# EAGLE board 10x10_charlieplexed_3.2x3.2_dual_headers (EAGLE 6.0)
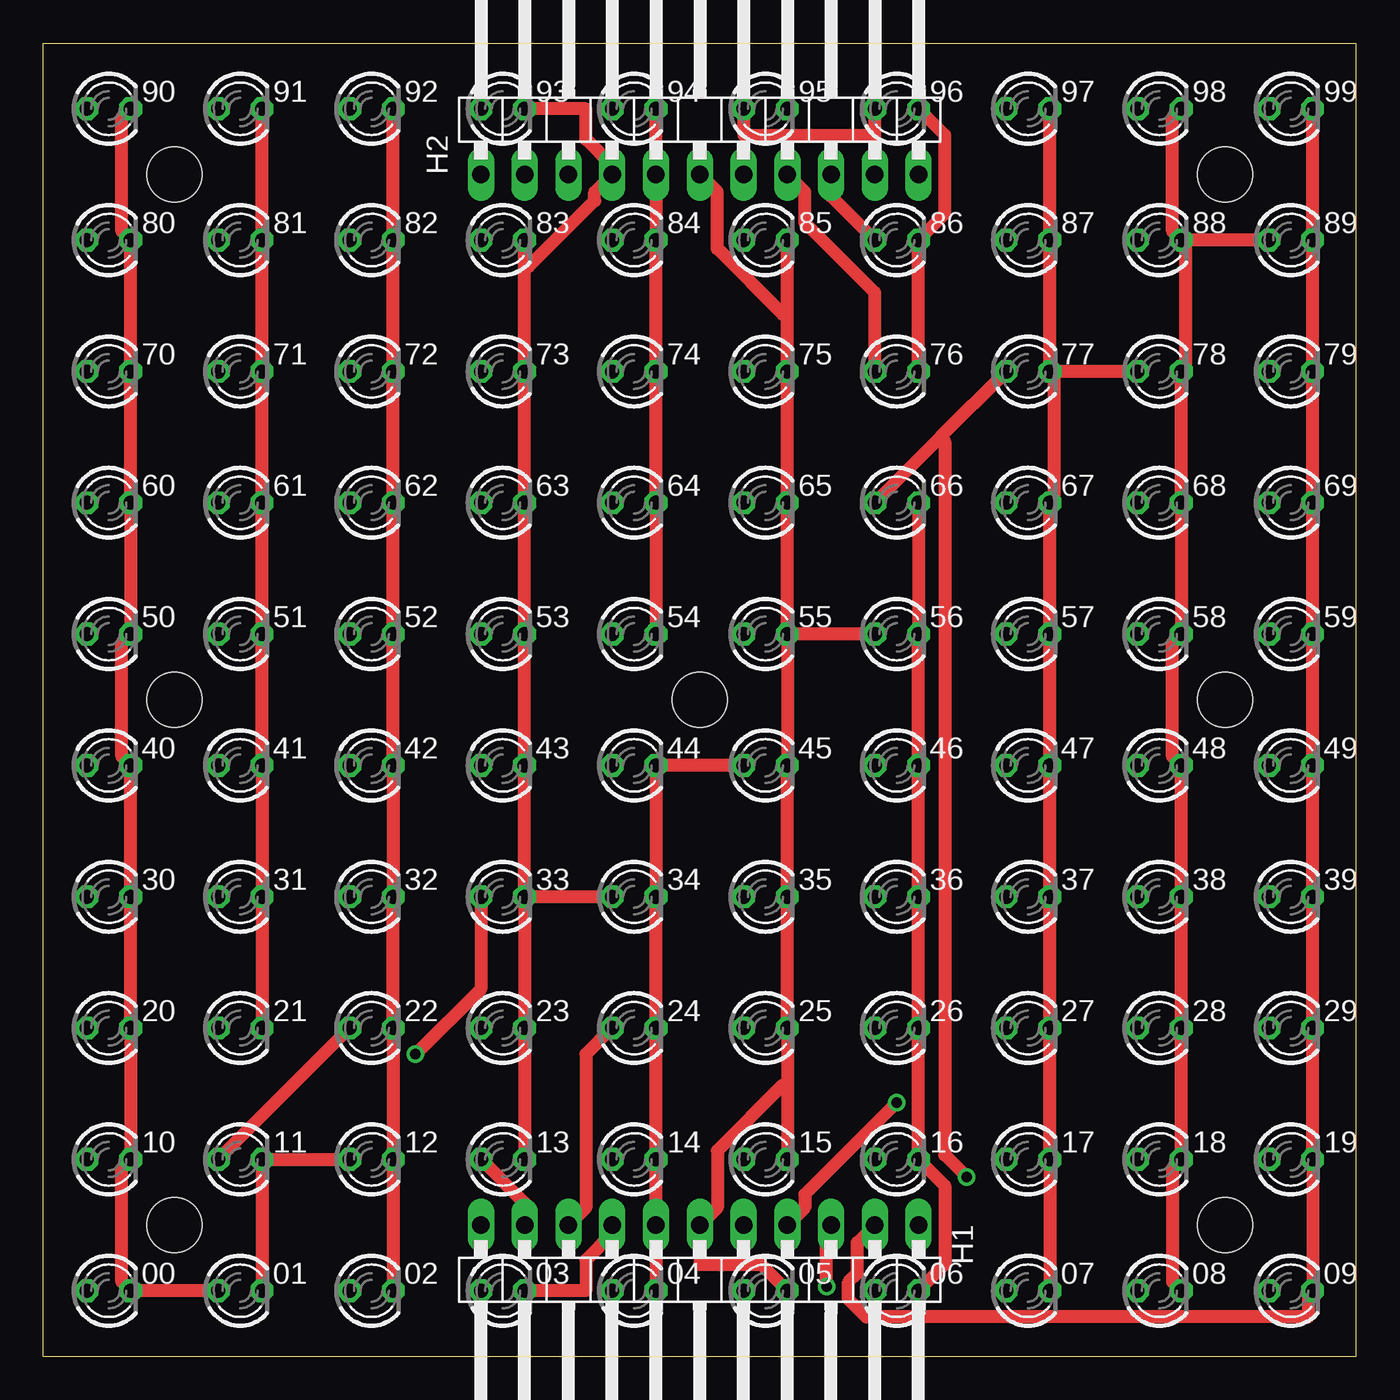
[diagram p0: board, top side]
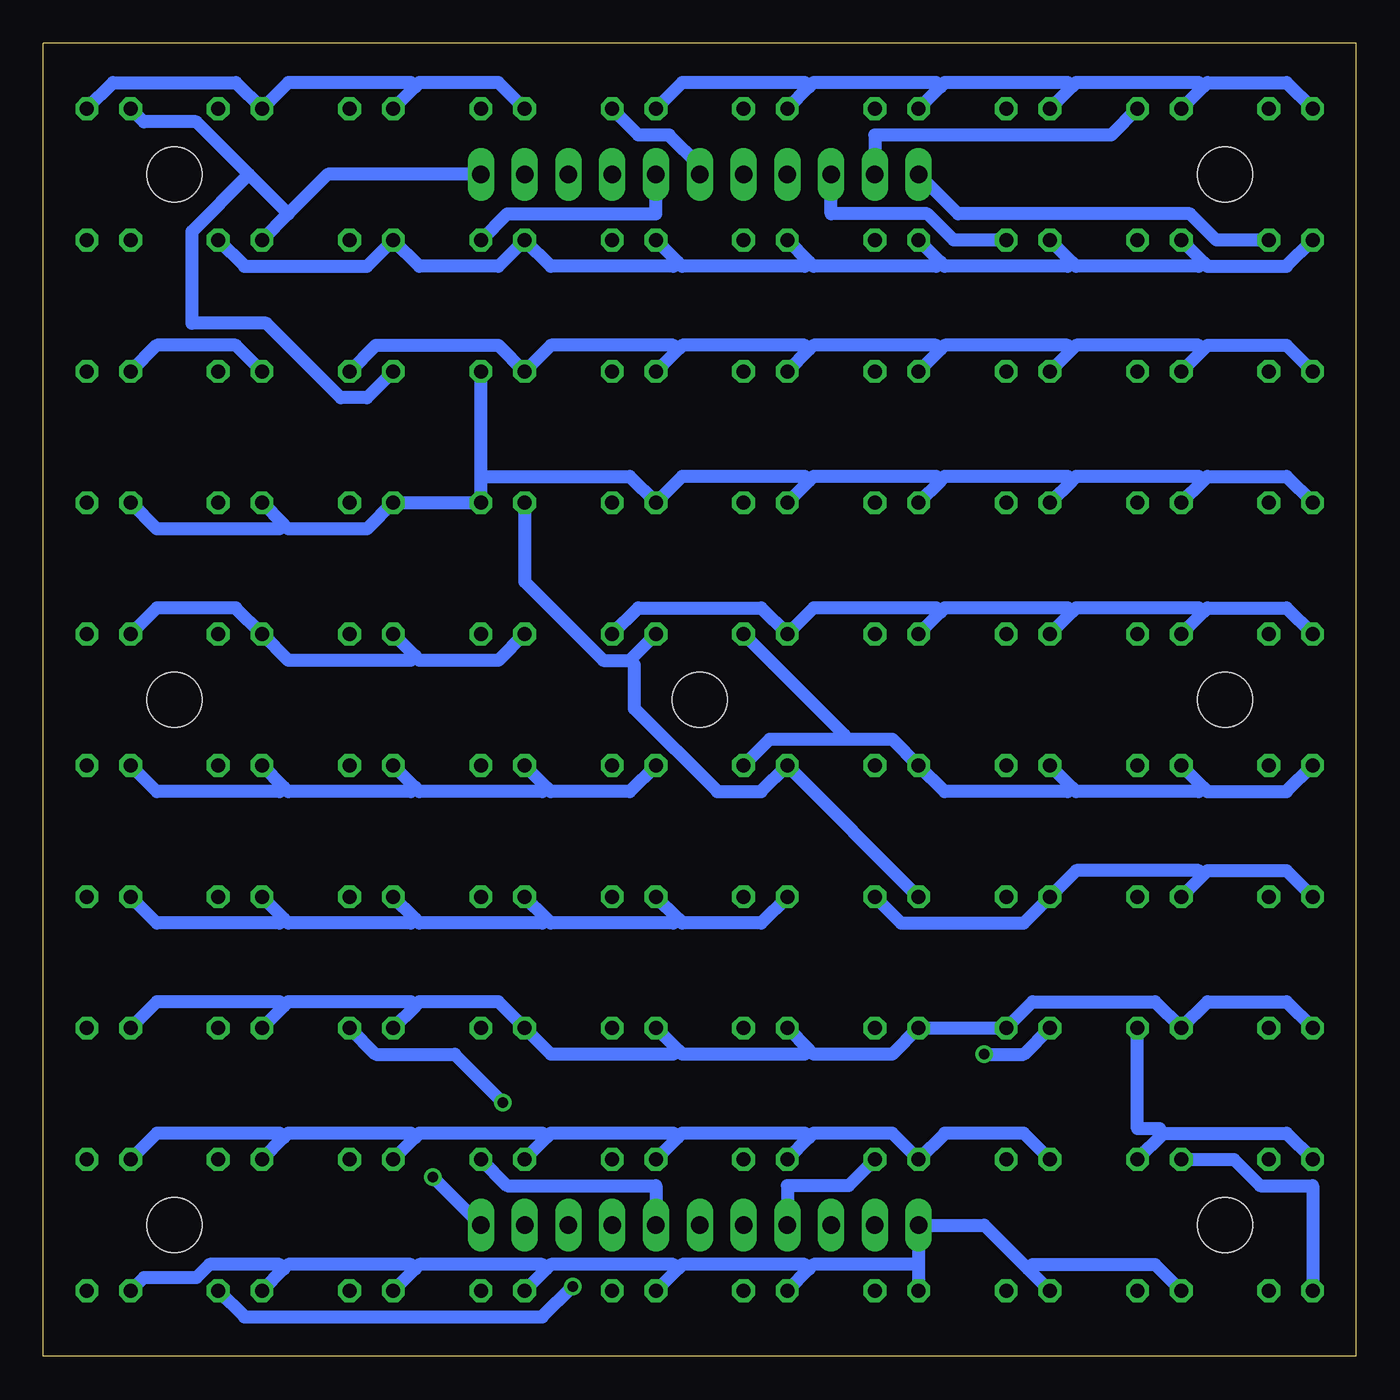
[diagram p1: board, bottom side, seen from below]

Size 76.2 x 76.2 mm. Coordinates in mm from the lower left corner, seen from the top.
Outline: 0,0 0,76.2 76.2,76.2 76.2,0 0,0
Copper layers (1*16): Top 0.035mm / dielectric 1.5mm / Bottom 0.035mm
Design rules: minimum track width 30mil, minimum drill 24mil, track to track 15mil, track to pad 15mil, pad to pad 8mil, via to via 8mil, smd to smd 8mil, copper to edge 40mil, drill to drill 8mil, minimum pad ring 10mil, minimum via ring 8mil, stop-mask expansion 4mil, vias tented up to drill 0mil, thermal gap 10mil
Holes 3.2 mm at 7.62,68.58 68.58,68.58 68.58,7.62 7.62,7.62 7.62,38.1 68.58,38.1 38.1,38.1

## Footprints (pad centres in the part's own frame; a part is rotated, then mirrored left to right if it is on the bottom)
LED3MM = drill 0.813 octagon: A -1.27,0; K 1.27,0
1X11/90 = drill 1.016 long: 1 -12.7,-3.81; 2 -10.16,-3.81; 3 -7.62,-3.81; 4 -5.08,-3.81; 5 -2.54,-3.81; 6 0,-3.81; 7 2.54,-3.81; 8 5.08,-3.81; 9 7.62,-3.81; 10 10.16,-3.81; 11 12.7,-3.81

## Placement (x,y rotation side)
00  [LED3MM]  3.81,3.81 0 top
01  [LED3MM]  11.43,3.81 0 top
02  [LED3MM]  19.05,3.81 0 top
03  [LED3MM]  26.67,3.81 0 top
04  [LED3MM]  34.29,3.81 0 top
05  [LED3MM]  41.91,3.81 0 top
06  [LED3MM]  49.53,3.81 0 top
07  [LED3MM]  57.15,3.81 0 top
08  [LED3MM]  64.77,3.81 0 top
09  [LED3MM]  72.39,3.81 0 top
10  [LED3MM]  3.81,11.43 0 top
11  [LED3MM]  11.43,11.43 0 top
12  [LED3MM]  19.05,11.43 0 top
13  [LED3MM]  26.67,11.43 0 top
14  [LED3MM]  34.29,11.43 0 top
15  [LED3MM]  41.91,11.43 0 top
16  [LED3MM]  49.53,11.43 0 top
17  [LED3MM]  57.15,11.43 0 top
18  [LED3MM]  64.77,11.43 0 top
19  [LED3MM]  72.39,11.43 0 top
20  [LED3MM]  3.81,19.05 0 top
21  [LED3MM]  11.43,19.05 0 top
22  [LED3MM]  19.05,19.05 0 top
23  [LED3MM]  26.67,19.05 0 top
24  [LED3MM]  34.29,19.05 0 top
25  [LED3MM]  41.91,19.05 0 top
26  [LED3MM]  49.53,19.05 0 top
27  [LED3MM]  57.15,19.05 0 top
28  [LED3MM]  64.77,19.05 0 top
29  [LED3MM]  72.39,19.05 0 top
30  [LED3MM]  3.81,26.67 0 top
31  [LED3MM]  11.43,26.67 0 top
32  [LED3MM]  19.05,26.67 0 top
33  [LED3MM]  26.67,26.67 0 top
34  [LED3MM]  34.29,26.67 0 top
35  [LED3MM]  41.91,26.67 0 top
36  [LED3MM]  49.53,26.67 0 top
37  [LED3MM]  57.15,26.67 0 top
38  [LED3MM]  64.77,26.67 0 top
39  [LED3MM]  72.39,26.67 0 top
40  [LED3MM]  3.81,34.29 0 top
41  [LED3MM]  11.43,34.29 0 top
42  [LED3MM]  19.05,34.29 0 top
43  [LED3MM]  26.67,34.29 0 top
44  [LED3MM]  34.29,34.29 0 top
45  [LED3MM]  41.91,34.29 0 top
46  [LED3MM]  49.53,34.29 0 top
47  [LED3MM]  57.15,34.29 0 top
48  [LED3MM]  64.77,34.29 0 top
49  [LED3MM]  72.39,34.29 0 top
50  [LED3MM]  3.81,41.91 0 top
51  [LED3MM]  11.43,41.91 0 top
52  [LED3MM]  19.05,41.91 0 top
53  [LED3MM]  26.67,41.91 0 top
54  [LED3MM]  34.29,41.91 0 top
55  [LED3MM]  41.91,41.91 0 top
56  [LED3MM]  49.53,41.91 0 top
57  [LED3MM]  57.15,41.91 0 top
58  [LED3MM]  64.77,41.91 0 top
59  [LED3MM]  72.39,41.91 0 top
60  [LED3MM]  3.81,49.53 0 top
61  [LED3MM]  11.43,49.53 0 top
62  [LED3MM]  19.05,49.53 0 top
63  [LED3MM]  26.67,49.53 0 top
64  [LED3MM]  34.29,49.53 0 top
65  [LED3MM]  41.91,49.53 0 top
66  [LED3MM]  49.53,49.53 0 top
67  [LED3MM]  57.15,49.53 0 top
68  [LED3MM]  64.77,49.53 0 top
69  [LED3MM]  72.39,49.53 0 top
70  [LED3MM]  3.81,57.15 0 top
71  [LED3MM]  11.43,57.15 0 top
72  [LED3MM]  19.05,57.15 0 top
73  [LED3MM]  26.67,57.15 0 top
74  [LED3MM]  34.29,57.15 0 top
75  [LED3MM]  41.91,57.15 0 top
76  [LED3MM]  49.53,57.15 0 top
77  [LED3MM]  57.15,57.15 0 top
78  [LED3MM]  64.77,57.15 0 top
79  [LED3MM]  72.39,57.15 0 top
80  [LED3MM]  3.81,64.77 0 top
81  [LED3MM]  11.43,64.77 0 top
82  [LED3MM]  19.05,64.77 0 top
83  [LED3MM]  26.67,64.77 0 top
84  [LED3MM]  34.29,64.77 0 top
85  [LED3MM]  41.91,64.77 0 top
86  [LED3MM]  49.53,64.77 0 top
87  [LED3MM]  57.15,64.77 0 top
88  [LED3MM]  64.77,64.77 0 top
89  [LED3MM]  72.39,64.77 0 top
90  [LED3MM]  3.81,72.39 0 top
91  [LED3MM]  11.43,72.39 0 top
92  [LED3MM]  19.05,72.39 0 top
93  [LED3MM]  26.67,72.39 0 top
94  [LED3MM]  34.29,72.39 0 top
95  [LED3MM]  41.91,72.39 0 top
96  [LED3MM]  49.53,72.39 0 top
97  [LED3MM]  57.15,72.39 0 top
98  [LED3MM]  64.77,72.39 0 top
99  [LED3MM]  72.39,72.39 0 top
H1  [1X11/90]  38.1,3.81 180 top
H2  [1X11/90]  38.1,72.39 0 top

## Library data of the parts
00 01-09 10-99 = led
H1 H2 = pinhead

## Nets
D: 00.A 11.A 22.A 33.A 44.A 55.A 66.A 77.A 88.A 99.A H1.1 H2.11
S0: 00.K 01.A 02.A 03.A 04.A 05.A 06.A 07.A 08.A 09.A 10.K 20.K 30.K 40.K 50.K 60.K 70.K 80.K 90.K H1.11 H2.1
S1: 01.K 10.A 11.K 12.A 13.A 14.A 15.A 16.A 17.A 18.A 19.A 21.K 31.K 41.K 51.K 61.K 71.K 81.K 91.K H1.10 H2.2
S2: 02.K 12.K 20.A 21.A 22.K 23.A 24.A 25.A 26.A 27.A 28.A 29.A 32.K 42.K 52.K 62.K 72.K 82.K 92.K H1.9 H2.3
S3: 03.K 13.K 23.K 30.A 31.A 32.A 33.K 34.A 35.A 36.A 37.A 38.A 39.A 43.K 53.K 63.K 73.K 83.K 93.K H1.8 H2.4
S4: 04.K 14.K 24.K 34.K 40.A 41.A 42.A 43.A 44.K 45.A 46.A 47.A 48.A 49.A 54.K 64.K 74.K 84.K 94.K H1.7 H2.5
S5: 05.K 15.K 25.K 35.K 45.K 50.A 51.A 52.A 53.A 54.A 55.K 56.A 57.A 58.A 59.A 65.K 75.K 85.K 95.K H1.6 H2.6
S6: 06.K 16.K 26.K 36.K 46.K 56.K 60.A 61.A 62.A 63.A 64.A 65.A 66.K 67.A 68.A 69.A 76.K 86.K 96.K H1.5 H2.7
S7: 07.K 17.K 27.K 37.K 47.K 57.K 67.K 70.A 71.A 72.A 73.A 74.A 75.A 76.A 77.K 78.A 79.A 87.K 97.K H1.4 H2.8
S8: 08.K 18.K 28.K 38.K 48.K 58.K 68.K 78.K 80.A 81.A 82.A 83.A 84.A 85.A 86.A 87.A 88.K 89.A 98.K H1.3 H2.9
S9: 09.K 19.K 29.K 39.K 49.K 59.K 69.K 79.K 89.K 90.A 91.A 92.A 93.A 94.A 95.A 96.A 97.A 98.A 99.K H1.2 H2.10

## Tracks (layer width: path | path; a pad name or v marks a point on that pad's centre or on a via)
D  (via drill 0.61)
  Top 0.762: 11.A 22.A | 66.A 52.07,53.34 | 52.07,53.34 77.A | v53.59,10.41 52.32,11.68 52.32,53.09 52.07,53.34 | v21.59,17.53 25.4,21.34 33.A
  Bottom 0.762: 00.A 2.54,9.91 5.59,9.91 7.11,11.43 11.A | 61.98,66.29 59.69,68.58 H2.11 | 61.98,66.29 88.A | 99.A 70.36,71.63 67.31,71.63 64.26,68.58 | 61.98,66.29 64.26,68.58 | 33.A 44.A 34.54,32.77 37.08,32.77 41.91,37.59 41.91,40.13 42.16,40.39 | 42.16,40.39 55.A | 42.16,40.39 43.69,40.39 48.26,44.96 66.A | v53.59,10.41 H1.1 | 64.26,68.58 67.56,65.28 67.56,59.94 63.25,59.94 58.93,55.63 57.4,55.63 77.A | 22.A 19.3,17.53 v21.59,17.53
S0
  Top 0.762: 90.K 4.57,71.88 4.57,65.28 80.K 70.K 60.K 50.K 4.57,41.4 4.57,34.8 40.K 30.K 20.K 10.K 4.57,10.92 4.57,4.32 00.K 01.A
  Bottom 0.762: H2.1 23.11,66.29 9.65,66.29 8.13,64.77 80.K | 19.05,5.08 21.59,7.62 H1.11 25.4,5.33 | 19.05,5.08 02.A | 25.4,5.33 03.A | 31.75,5.08 31.5,5.33 25.4,5.33 | 31.75,5.08 04.A | 39.37,5.08 39.12,5.33 32,5.33 31.75,5.08 | 39.37,5.08 05.A | 46.99,5.08 46.74,5.33 39.62,5.33 39.37,5.08 | 46.99,5.08 06.A | 54.61,5.08 54.36,5.33 47.24,5.33 46.99,5.08 | 54.61,5.08 07.A | 62.23,5.08 61.98,5.33 54.86,5.33 54.61,5.08 | 62.23,5.08 08.A | 09.A 70.36,4.57 67.31,4.57 66.55,5.33 62.48,5.33 62.23,5.08 | 01.A 11.68,5.33 18.8,5.33 19.05,5.08
S1
  Top 0.762: 13.A 27.94,8.89 H1.10 | 01.K 11.K 12.A | 91.K 81.K 71.K 61.K 51.K 41.K 31.K 21.K
  Bottom 0.762: 31.75,12.7 31.5,12.95 26.92,12.95 13.A 23.88,12.95 19.3,12.95 12.A | 31.75,12.7 14.A | 39.37,12.7 39.12,12.95 32,12.95 31.75,12.7 | 39.37,12.7 15.A | 46.99,12.7 46.74,12.95 39.62,12.95 39.37,12.7 | 46.99,12.7 16.A | 54.61,12.7 54.36,12.95 47.24,12.95 46.99,12.7 | 54.61,12.7 17.A | 62.23,12.7 61.98,12.95 54.86,12.95 54.61,12.7 | 62.23,12.7 18.A | 19.A 69.6,12.95 62.48,12.95 62.23,12.7 | 10.A 4.06,12.95 11.18,12.95 | 11.K 11.18,12.95 | 21.K 12.7,13.21 11.43,13.21 11.18,12.95 | H2.2 27.94,70.87 14.22,70.87 91.K
S2
  Top 0.762: 92.K 82.K 72.K 62.K 52.K 42.K 32.K 22.K 12.K 02.K | H1.9 31.5,8.64 31.5,17.53 24.A
  Bottom 0.762: H2.3 30.48,66.29 24.89,66.29 23.37,64.77 82.K | 20.A 4.06,20.57 8.64,20.57 21.A 11.68,20.57 18.8,20.57 22.K 23.A 26.92,17.53 31.5,17.53 31.75,17.78 | 31.75,17.78 24.A | 39.37,17.78 39.12,17.53 32,17.53 31.75,17.78 | 39.37,17.78 25.A | 39.37,17.78 39.62,17.53 46.74,17.53 26.A 49.78,20.57 54.36,20.57 54.61,20.32 | 54.61,20.32 27.A | 62.23,20.32 61.98,20.57 54.86,20.57 54.61,20.32 | 62.23,20.32 28.A | 29.A 69.6,20.57 62.48,20.57 62.23,20.32
S3
  Top 0.762: 93.K 31.5,72.39 31.5,70.61 33.02,69.09 H2.4 32,67.56 32,67.06 28.19,63.25 27.94,63.25 | 03.K 31.5,3.81 31.5,5.59 33.02,7.11 H1.8 | 13.K 23.K 33.K | 34.A 33.K | 33.K 43.K 53.K 63.K 73.K 27.94,63.25 | 27.94,63.25 83.K
  Bottom 0.762: 30.A 4.06,28.19 8.64,28.19 8.89,27.94 | 31.A 8.89,27.94 | 8.89,27.94 9.14,28.19 16.26,28.19 32.A 19.3,25.15 26.42,25.15 33.K | 39.37,25.4 39.12,25.15 34.54,25.15 34.A | 39.37,25.4 35.A | 46.99,25.4 46.74,25.15 39.62,25.15 39.37,25.4 | 46.99,25.4 36.A | 54.61,25.4 54.36,25.15 47.24,25.15 46.99,25.4 | 54.61,25.4 37.A | 62.23,25.4 61.98,25.15 54.86,25.15 54.61,25.4 | 62.23,25.4 38.A | 39.A 69.6,25.15 62.48,25.15 62.23,25.4 | H1.8 33.02,9.91 29.46,9.91 13.K
S4
  Top 0.762: 94.K H2.5 84.K 74.K 64.K 54.K | 04.K H1.7 14.K 24.K 34.K 44.K 45.A
  Bottom 0.762: 40.A 4.06,32.77 8.64,32.77 8.89,33.02 | 41.A 8.89,33.02 | 16.51,33.02 16.26,32.77 9.14,32.77 8.89,33.02 | 16.51,33.02 42.A | 16.51,33.02 16.76,32.77 23.88,32.77 43.A 26.92,35.81 29.72,35.81 | 46.99,33.02 46.74,32.77 42.16,32.77 45.A | 46.99,33.02 46.A | 54.61,33.02 54.36,32.77 47.24,32.77 46.99,33.02 | 54.61,33.02 47.A | 62.23,33.02 61.98,32.77 54.86,32.77 54.61,33.02 | 62.23,33.02 48.A | 49.A 69.6,32.77 62.48,32.77 62.23,33.02 | 29.72,35.81 34.04,35.81 44.K | 54.K 29.72,36.07 29.72,35.81
S5
  Top 0.762: 05.K 41.66,5.33 38.1,5.33 H1.6 39.12,8.64 39.12,11.94 42.93,15.75 43.18,15.75 | 43.18,15.75 25.K 35.K 45.K 55.K | 43.18,15.75 15.K | 56.A 55.K | 55.K 65.K 75.K 43.18,60.45 | 43.18,60.45 85.K | H2.6 39.12,67.56 39.12,64.26 42.93,60.45 43.18,60.45
  Bottom 0.762: 50.A 4.06,43.43 8.64,43.43 8.89,43.18 | 51.A 8.89,43.18 | 16.51,43.18 16.26,43.43 9.14,43.43 8.89,43.18 | 16.51,43.18 52.A | 24.13,43.18 23.88,43.43 16.76,43.43 16.51,43.18 | 24.13,43.18 53.A | 24.13,43.18 24.38,43.43 31.5,43.43 54.A 34.54,43.43 41.66,43.43 55.K | 95.K 41.66,70.87 39.88,70.87 38.1,69.09 H2.6 | 54.61,40.64 54.36,40.39 49.78,40.39 56.A | 54.61,40.64 57.A | 54.61,40.64 54.86,40.39 61.98,40.39 58.A 65.02,43.43 69.6,43.43 59.A
S6
  Top 0.762: 06.K 52.32,5.33 52.32,9.91 16.K 26.K 36.K 46.K 56.K 66.K | 76.K 86.K 52.32,66.29 52.32,70.87 96.K
  Bottom 0.762: H1.5 40.64,9.91 49.28,9.91 16.K | 60.A 4.06,51.05 8.64,51.05 8.89,50.8 | 61.A 8.89,50.8 | 16.51,50.8 16.26,51.05 9.14,51.05 8.89,50.8 | 16.51,50.8 62.A | 24.13,50.8 23.88,51.05 16.76,51.05 16.51,50.8 | 24.13,50.8 63.A | 31.75,50.8 31.5,51.05 24.38,51.05 24.13,50.8 | 31.75,50.8 64.A | 31.75,50.8 32,51.05 39.12,51.05 65.A 42.16,51.05 50.8,51.05 | 50.8,51.05 66.K 67.A 57.4,48.01 61.98,48.01 62.23,48.26 | 50.8,51.05 76.K | 62.23,48.26 68.A | 69.A 69.6,48.01 62.48,48.01 62.23,48.26 | H2.7 40.64,66.29 49.28,66.29 86.K
S7  (via drill 0.61)
  Top 0.762: H2.8 44.2,67.56 44.2,65.79 48.26,61.72 76.A | 78.A 77.K | 77.K 87.K 97.K | 07.K 17.K 27.K 37.K 47.K 57.K 67.K 58.67,49.78 58.67,56.9 77.K | H1.4 44.2,8.64 44.2,9.4 v49.53,14.73
  Bottom 0.762: 70.A 4.06,58.67 8.64,58.67 8.89,58.42 | 71.A 8.89,58.42 | 16.51,58.42 16.26,58.67 9.14,58.67 8.89,58.42 | 16.51,58.42 72.A | 24.13,58.42 23.88,58.67 16.76,58.67 16.51,58.42 | 24.13,58.42 73.A | 31.75,58.42 31.5,58.67 24.38,58.67 24.13,58.42 | 31.75,58.42 74.A | 39.37,58.42 39.12,58.67 32,58.67 31.75,58.42 | 39.37,58.42 75.A | 39.37,58.42 39.62,58.67 46.74,58.67 76.A 49.78,58.67 56.9,58.67 77.K | 79.A 69.6,58.67 65.02,58.67 78.A | v49.53,14.73 52.32,17.53 56.9,17.53 27.K
S8  (via drill 0.61)
  Top 0.762: 86.A 45.72,67.31 H2.9 | 89.A 88.K | 98.K 65.53,71.88 65.53,65.28 88.K | 88.K 66.29,64.52 66.29,57.4 78.K 68.K 58.K 65.53,41.4 65.53,34.8 48.K 38.K 28.K 18.K 65.53,10.92 65.53,4.32 08.K | H1.3 45.47,7.37 v45.47,4.06
  Bottom 0.762: 80.A 4.06,63.25 8.64,63.25 8.89,63.5 | 81.A 8.89,63.5 | 16.51,63.5 16.26,63.25 9.14,63.25 8.89,63.5 | 16.51,63.5 82.A | 24.13,63.5 23.88,63.25 16.76,63.25 16.51,63.5 | 24.13,63.5 83.A | 31.75,63.5 31.5,63.25 24.38,63.25 24.13,63.5 | 31.75,63.5 84.A | 39.37,63.5 39.12,63.25 32,63.25 31.75,63.5 | 39.37,63.5 85.A | 39.37,63.5 39.62,63.25 46.74,63.25 86.A 49.78,63.25 54.36,63.25 87.A 57.4,63.25 64.52,63.25 88.K | v45.47,4.06 47.24,2.29 64.52,2.29 08.K
S9
  Top 0.762: H2.10 48.26,70.87 | 48.26,70.87 96.A | 48.26,70.87 40.64,70.87 95.A | 99.K 89.K 79.K 69.K 59.K 49.K 39.K 29.K 19.K 09.K 73.41,3.56 73.41,2.29 47.75,2.29 46.74,3.3 46.74,4.32 47.24,4.83 47.24,6.6 H1.2
  Bottom 0.762: 54.61,73.66 54.36,73.91 49.78,73.91 96.A | 54.61,73.66 97.A | 54.61,73.66 54.86,73.91 61.98,73.91 98.A 65.02,73.91 72.14,73.91 99.K | 90.A 4.06,73.91 8.64,73.91 8.89,73.66 | 91.A 8.89,73.66 | 16.51,73.66 16.26,73.91 9.14,73.91 8.89,73.66 | 16.51,73.66 92.A | 24.13,73.66 23.88,73.91 16.76,73.91 16.51,73.66 | 24.13,73.66 93.A | 31.75,73.66 31.5,73.91 24.38,73.91 24.13,73.66 | 31.75,73.66 94.A | 95.A 39.12,73.91 32,73.91 31.75,73.66